# Altium PCB old_ESP32_CAN_V2.PcbDoc
Units mm, origin at the board's own origin, x right, y up, seen from the top; angles counter-clockwise.
Board outline 100 x 100 mm, 2 copper layers (Top Layer, Bottom Layer); 87 components, 95 nets, 363 pads, 0 vias.
Unrouted connection lines stored in the file: 247.
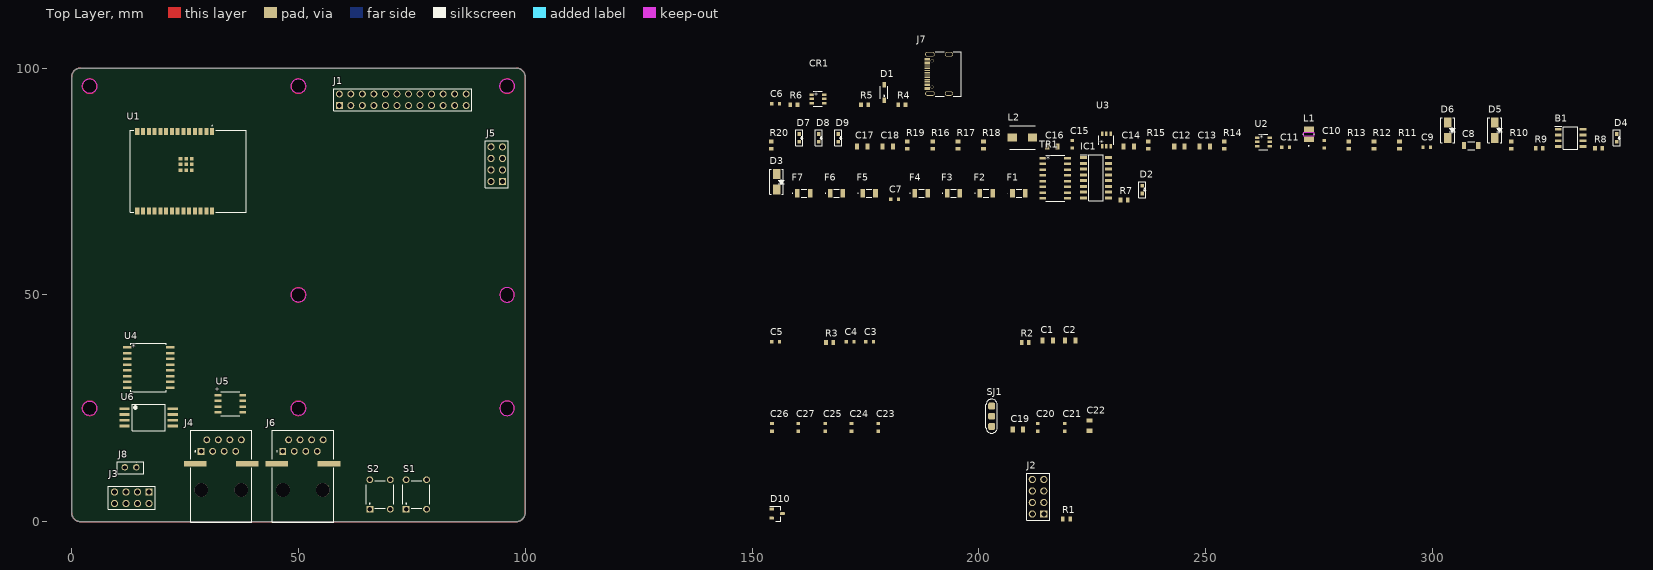
[diagram p0: Top Layer view]
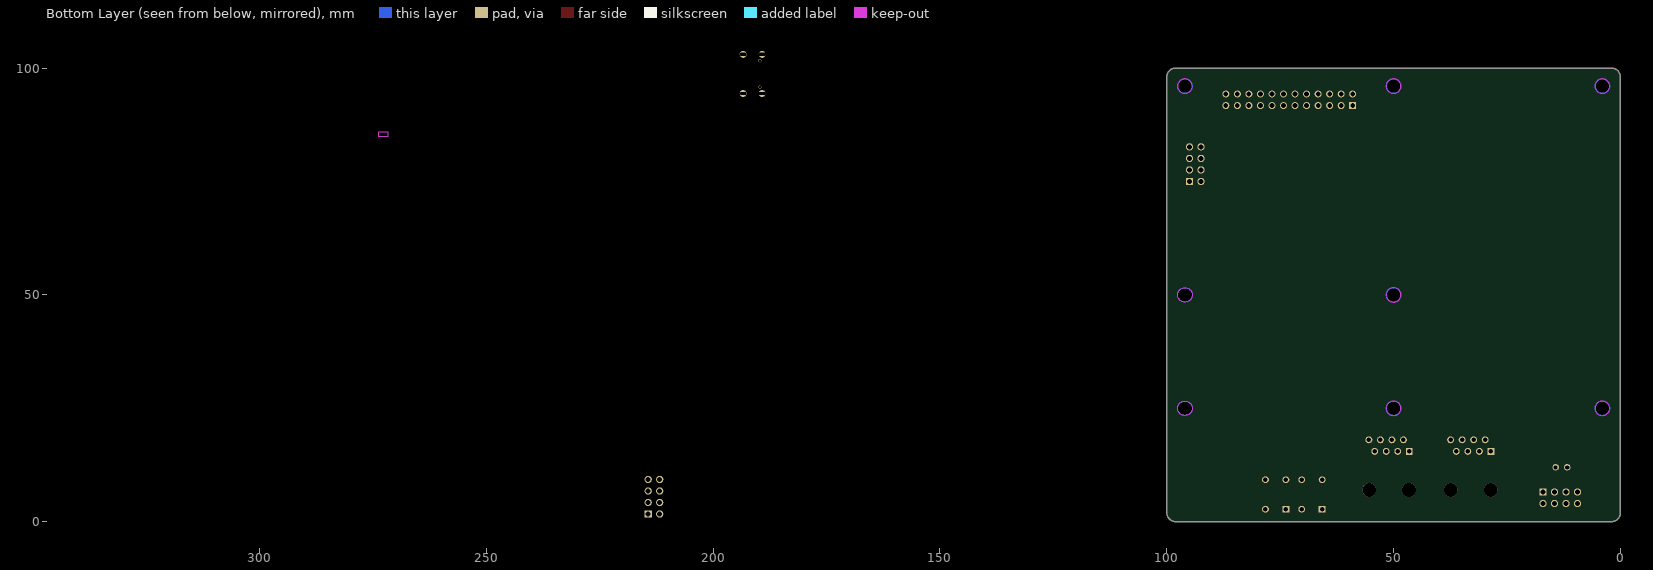
[diagram p1: Bottom Layer view, seen from below]

## Layer stack, top to bottom
Top Solder: solder mask 0.0102, Solder Resist, Dk 3.5
Top Layer: signal copper 0.0356
Dielectric 1: dielectric 0.32, FR-4, Dk 4.8
Bottom Layer: signal copper 0.0356
Bottom Solder: solder mask 0.0102, Solder Resist, Dk 3.5

## Board outline
2,0 cw(c2,2) 0,2 0,98 cw(c2,98) 2,100 98,100 cw(c98,98) 100,98 100,2 cw(c98,2) 98,0
cut-out: 94.4,50 ccw(c96,50) 96,48.4 ccw(c96,50) 97.6,50 ccw(c96,50) 96,51.6 ccw(c96,50)
cut-out: 50,48.4 cw(c50,50) 48.4,50 cw(c50,50) 50,51.6 cw(c50,50) 51.6,50 cw(c50,50)
cut-out: 48.4,96 cw(c50,96) 50,97.6 cw(c50,96) 51.6,96 cw(c50,96) 50,94.4 cw(c50,96)
cut-out: 48.4,25 cw(c50,25) 50,26.6 cw(c50,25) 51.6,25 cw(c50,25) 50,23.4 cw(c50,25)
cut-out: 96,23.4 ccw(c96,25) 97.6,25 ccw(c96,25) 96,26.6 ccw(c96,25) 94.4,25 ccw(c96,25)
cut-out: 2.4,96 cw(c4,96) 4,97.6 cw(c4,96) 5.6,96 cw(c4,96) 4,94.4 cw(c4,96)
cut-out: 4,23.4 cw(c4,25) 2.4,25 cw(c4,25) 4,26.6 cw(c4,25) 5.6,25 cw(c4,25)
cut-out: 96,94.4 cw(c96,96) 94.4,96 cw(c96,96) 96,97.6 cw(c96,96) 97.6,96 cw(c96,96)

## Design rules (kind name [scope] priority, off if disabled: settings)
Clearance [All] p1: gap=0.254 ignorepadtopadclearanceinfootprint=FALSE
PolygonConnect [All] p1: connectstyle=Relief reliefconductorwidth=0.254 reliefentries=4 polygonreliefangle="90 Angle" airgapwidth=0.254
RoutingVias [All] p1: holewidth=0.711 width=1.27 viastyle="Through Hole" minholewidth=0.711 minwidth=1.27 maxholewidth=0.711 maxwidth=1.27
SolderMaskExpansion [All] p1: expansion=0.102 istentingtop=FALSE
SupplyNets "Schematic Supply Nets_7" [InNet('+3V3')] p1: voltage=0.000
SupplyNets "Schematic Supply Nets_6" [InNet('+5')] p2: voltage=0.000
SupplyNets "Schematic Supply Nets_5" [InNet('+5V')] p3: voltage=0.000
SupplyNets "Schematic Supply Nets_4" [InNet('+12')] p4: voltage=0.000
SupplyNets "Schematic Supply Nets_3" [InNet('+12V')] p5: voltage=0.000
SupplyNets "Schematic Supply Nets_2" [InNet('+12_fused')] p6: voltage=0.000
SupplyNets "Schematic Supply Nets_1" [InNet('+5V0')] p7: voltage=0.000
SupplyNets "Schematic Supply Nets" [InNet('GND')] p8: voltage=0.000
Width [All] p1: maxlimit=0.254 minlimit=0.254 preferedwidth=0.254
30 further rules are at their usual default settings.

## Classes and differential pairs
net class OUT[6..0]: OUT0 OUT1 OUT2 OUT3 OUT4 OUT5 OUT6
net class GPIO[15..0]: GPIO0 GPIO1 GPIO2 GPIO3 GPIO4 GPIO5 GPIO6 GPIO7 GPIO8 GPIO9 GPIO10 GPIO11 GPIO12 GPIO13 GPIO14 GPIO15
component class U_ESP32_CAN_V2-usb: C6 CR1 D1 J7 R4 R5 R6
component class U_ESP32_CAN_V2-power: B1 C8 C9 C10 C11 C12 C13 C14 C15 C16 C17 C18 D4 D5 D6 D7 D8 D9 L1 L2 R8 R9 R10 R11 R12 R13 R14 R15 R16 R17 R18 R19 R20 U2 U3
component class U_ESP32_CAN_V2-out: C7 D2 D3 F1 F2 F3 F4 F5 F6 F7 IC1 R7 TR1
component class U_ESP32_CAN_V2-mcu: C1 C2 C3 C4 C5 R2 R3 S1 S2 U1
component class U_ESP32_CAN_V2-can: C19 C20 C21 C22 C23 C24 C25 C26 C27 D10 SJ1 U4 U5 U6
component class ESP32_CAN_V2-main: J1 J2 J3 J4 J5 J6 J8 R1

## Components (designator, comment, footprint, x,y, rotation, side; value= is the part's Value field where it differs from the comment)
B1 "TPS25921ADR" SOIC127P600X175-8N 330.399,84.6 r0 top
C1 "10u" C0805 215.2,39.9 r0 top
C2 "10u" C0805 220.1,39.9 r0 top
C3 "1u" C0603 175.9,39.7 r0 top
C4 "0.1u" C0603 171.6,39.7 r0 top
C5 "0.1u" C0603 155.2,39.7 r0 top
C6 "1n" C0603 155.2,92.1 r0 top
C7 "100n" C0603 181.4,71.1 r0 top
C8 "100u" C1206 308.499,82.9 r0 top
C9 "0.1u" C0603 298.699,82.5 r0 top
C10 "2u" C0603 276.099,83.2 r90 top
C11 "100n" C0603 267.599,82.5 r0 top
C12 "22u" C0805 244.199,82.7 r0 top
C13 "22u" C0805 249.799,82.7 r0 top
C14 "10u" C0805 232.999,82.7 r0 top
C15 "0.1u" C0603 220.6,83.2 r90 top
C16 "2u2" C0805 216.2,82.7 r0 top
C17 "22u" C0805 174.3,82.7 r0 top
C18 "22u" C0805 179.9,82.7 r0 top
C19 "10u" C0805 208.6,20.3 r0 top
C20 "100n" C0603 213,20.8 r90 top
C21 "100n" C0603 218.9,20.8 r90 top
C22 "10u" C0805 224.4,21.2 r90 top
C23 "47p" C0603 177.8,20.8 r90 top
C24 "47p" C0603 171.9,20.8 r90 top
C25 "47p" C0603 166.1,20.8 r90 top
C26 "100n" C0603 154.4,20.8 r90 top
C27 "100n" C0603 160.2,20.8 r90 top
CR1 "USBLC6-2SC6" SOT23-6L_STM 164.5,93.2 r0 top
D1 "1N5819HW-7-F" SOD3715X145N 179.1,94.6 r90 top
D2 "LED" LED 235.999,73.2 r90 top
D3 "SMAJ30A" SMASERIES_LTF 155.4,74.9 r90 top
D4 "LED" LED 340.599,84.6 r90 top
D5 "SMAJ30A" SMASERIES_LTF 313.699,86.3 r90 top
D6 "SMAJ58CA" SMASERIES_LTF 303.299,86.3 r90 top
D7 "LED" LED 160.4,84.6 r90 top
D8 "LED" LED 164.7,84.6 r90 top
D9 "LED" LED 169,84.6 r90 top
D10 "NUP2105L" SOT-23 155.5,1.8 r0 top
F1 "PTC Fuse" PTSAHT120624V050 208.8,72.4 r0 top
F2 "PTC Fuse" PTSAHT120624V050 201.6,72.4 r0 top
F3 "PTC Fuse" PTSAHT120624V050 194.4,72.4 r0 top
F4 "PTC Fuse" PTSAHT120624V050 187.3,72.4 r0 top
F5 "PTC Fuse" PTSAHT120624V050 175.8,72.4 r0 top
F6 "PTC Fuse" PTSAHT120624V050 168.6,72.4 r0 top
F7 "PTC Fuse" PTSAHT120624V050 161.4,72.4 r0 top
IC1 "74HC595D" SOIC127P600X175-16N 225.799,75.8 r0 top
J1 "PinHeader_2x12" AMPHENOL_10129381-924003BLF 73,93 r0 top
J2 "Conn_2x4" CONN_10129381-X08002XLF_AMP 214.3,1.7 r90 top
J3 "Conn_2x3" CONN_10129381-X08002XLF_AMP 17.08,6.54 r180 top
J4 "RJE56" AMPHENOL_RJE561881410 33,7 r0 top
J5 "Conn_2x4" CONN_10129381-X08002XLF_AMP 95,75 r90 top
J6 "RJE56" AMPHENOL_RJE561881410 51,7 r0 top
J7 "USB4105-GF-A" USB4105_GCT 192.1,98.7 r90 top
J8 "Jumper_1x1" CON2_1X2_TU_TSW 13,12 r180 top
L1 "LCENA2520MKT2R2M0NK" IND_LCEN_2520MK_TAY 272.699,85.4 r90 top
L2 "AMPLA5030S-6R8MT" IND_AMPLA5030S-6R8MT 209.6,84.7 r0 top
R1 "120R" R0603 219.3,0.6 r0 top
R2 "10k" R0603 210.2,39.5 r0 top
R3 "3k3" R0603 167.1,39.5 r0 top
R4 "5k1" R0603 183,91.9 r0 top
R5 "5k1" R0603 174.8,91.9 r0 top
R6 "100k" R0603 159.2,91.9 r0 top
R7 "120R" R0603 231.999,70.9 r0 top
R8 "1k" R0603 336.599,82.3 r0 top
R9 "100k" R0603 323.499,82.3 r0 top
R10 "470R" R0603 317.299,83 r90 top
R11 "64k9" R0603 292.699,83 r90 top
R12 "154k" R0603 287.099,83 r90 top
R13 "30k9" R0603 281.499,83 r90 top
R14 "31k6" R0603 254.099,83 r90 top
R15 "10k" R0603 237.299,83 r90 top
R16 "1k" R0603 189.8,83 r90 top
R17 "320R" R0603 195.4,83 r90 top
R18 "120R" R0603 201,83 r90 top
R19 "100k" R0603 184.2,83 r90 top
R20 "13k7" R0603 154.2,83 r90 top
S1 "TS02-66-70-BK-260-SCR-D" SW_TS02-66-70-BK-260-SCR-D 76,6 r90 top
S2 "TS02-66-70-BK-260-SCR-D" SW_TS02-66-70-BK-260-SCR-D 68,6 r90 top
SJ1 "Solderj Jumper" "SOLDERJUMPER 1X2" 202.8,21 r90 top
TR1 "ULN2003ADR" ULN2003ADR2G_OSI 216.8,75.7 r0 top
U1 "ESP32-C6-WROOM-1-N4" ESP32C6WROOM1N4 25.74,77.25 r270 top
U2 "AP62250WU-7" TSOT26STANDARD_DIO 262.699,83.7 r0 top
U3 "LMR51430YDDCR" SOT-23-THIN-6_DDC_TEX 228.099,84.1 r90 top
U4 "R05CTE05S-R" SMD_16_10.35X7.5X2.5_RCP 17,34 r0 top
U5 "TCAN1051HGDR" D8_TEX 35,26 r0 top
U6 "ISO6721FQDWVRQ1" DWV0008A-IPC_A 17,23 r0 top

## Footprints (in the part's own frame and the unit in brackets; to place one, negate y for a bottom-side part, rotate by r counter-clockwise, add the part's x,y. Pads: shape width x height; smd on the part's side, far side on the other; paste and mask are expansions set on the pad)
AMPHENOL_10129381-924003BLF [mm]
  rect 1.53x1.53 / inner round 1.53 / far side rect 1.53x1.53 hole 1.02: 01(-13.97,-1.27)
  round 1.53 hole 1.02: 02(-13.97,1.27) 03(-11.43,-1.27) 04(-11.43,1.27) 05(-8.89,-1.27) 06(-8.89,1.27) 07(-6.35,-1.27) 08(-6.35,1.27) 09(-3.81,-1.27) 10(-3.81,1.27) 11(-1.27,-1.27) 12(-1.27,1.27) 13(1.27,-1.27) 14(1.27,1.27) 15(3.81,-1.27) 16(3.81,1.27) 17(6.35,-1.27) 18(6.35,1.27) 19(8.89,-1.27) 20(8.89,1.27) 21(11.43,-1.27) 22(11.43,1.27) 23(13.97,-1.27) 24(13.97,1.27)
  silkscreen extent -15.24,-2.41 15.24,2.41, body extent -15.24,-2.41 15.24,2.41, height 10.42
AMPHENOL_RJE561881410 [mm]
  rect 1.5x1.5 / inner round 1.5 / far side rect 1.5x1.5 hole 1: 1(-4.445,8.5)
  round 1.5 hole 1: 2(-3.175,11.04) 3(-1.905,8.5) 4(-0.635,11.04) 5(0.635,8.5) 6(1.905,11.04) 7(3.175,8.5) 8(4.445,11.04)
  rect 5x1.2 smd paste-3: G1(-5.75,5.8) G2(5.75,5.8)
  round 3 hole 3 unplated: ""(-4.4,0) ""(4.4,0)
  silkscreen extent -6.75,-7.1 6.75,13.2, body extent -6.75,-7.1 6.75,13.2, height 14.61
C0603 [mm] "Ceramic Capacitors, 0603, body 1.6x0.8mm"
  rect 0.7x0.8 smd: 1(-0.85,0) 2(0.85,0)
  body extent -0.8,-0.4 0.8,0.4, height 0.8
C0805 [mm] "Ceramic Capacitors, body 2x1.25mm"
  rect 0.9x1.3 smd: 1(-1.15,0) 2(1.15,0)
  body extent -1,-0.63 1,0.63, height 0.8
C1206 [mm] "Ceramic Capacitors, body 3.2x1.6mm"
  rect 0.9x1.6 smd: 1(-1.55,0) 2(1.55,0)
  silkscreen extent -0.8,-0.87 0.8,0.87, body extent -1.6,-0.8 1.6,0.8, height 0.95
CON2_1X2_TU_TSW [mil]
  round 55 hole 35 paste-99999 mask+0: 1(-50,0) 2(50,0)
  silkscreen extent -115,-50 115,55, body extent -100,-50 100,50, height 500
CONN_10129381-X08002XLF_AMP [mil]
  rect 63x63 hole 43 paste-99999 mask+0: 1(0,0)
  round 63 hole 43 paste-99999 mask+0: 2(0,100) 3(100,0) 4(100,100) 5(200,0) 6(200,100) 7(300,0) 8(300,100)
  silkscreen extent -55,-50 355,150, body extent -50,-50 350,150, height 338
D8_TEX [mm]
  rect 1.455x0.558 smd paste+0 mask+0: 1(-2.721,1.905) 2(-2.721,0.635) 3(-2.721,-0.635) 4(-2.721,-1.905) 5(2.721,-1.905) 6(2.721,-0.635) 7(2.721,0.635) 8(2.721,1.905)
  silkscreen extent -2.12,-2.63 2.12,2.63, body extent -3.1,-2.5 3.1,2.5, height 1.76
DWV0008A-IPC_A [mm]
  rect 2.254x0.622 smd paste+0 mask+0: 1(-5.301,1.905) 2(-5.301,0.635) 3(-5.301,-0.635) 4(-5.301,-1.905) 5(5.301,-1.905) 6(5.301,-0.635) 7(5.301,0.635) 8(5.301,1.905)
  silkscreen extent -3.67,-2.93 3.67,2.93
ESP32C6WROOM1N4 [mm]
  rect 1.5x0.9 smd: 1(-8.75,5.26) 2(-8.75,3.99) 3(-8.75,2.72) 4(-8.75,1.45) 5(-8.75,0.18) 6(-8.75,-1.09) 7(-8.75,-2.36) 8(-8.75,-3.63) 9(-8.75,-4.9) 10(-8.75,-6.17) 11(-8.75,-7.44) 12(-8.75,-8.71) 13(-8.75,-9.98) 14(-8.75,-11.25) 15(8.75,-11.25) 16(8.75,-9.98) 17(8.75,-8.71) 18(8.75,-7.44) 19(8.75,-6.17) 20(8.75,-4.9) 21(8.75,-3.63) 22(8.75,-2.36) 23(8.75,-1.09) 24(8.75,0.18) 25(8.75,1.45) 26(8.75,2.72) 27(8.75,3.99) 28(8.75,5.26)
  rect 0.8x0.8 smd: 29(-1.505,-0.46) 30(-1.505,0.79) 31(-2.755,0.79) 32(-2.755,-0.46) 33(-2.755,-1.71) 34(-1.505,-1.71) 35(-0.255,-1.71) 36(-0.255,-0.46) 37(-0.255,0.79)
  silkscreen extent -10.1,-12.75 9,12.75, body extent -9.01,-12.8 9.01,12.7, height 3.1
IND_AMPLA5030S-6R8MT [mm]
  rect 2x1.8 smd: 1(-2.25,0) 2(2.25,0)
  silkscreen extent -2.85,-2.6 2.85,2.6, body extent -2.92,-2.6 2.92,2.6, height 2.8
IND_LCEN_2520MK_TAY [mil]
  rect 48.78x87 smd paste+0 mask+0: 1(-42.39,0) 2(42.39,0)
  Top Layer keep-out region: -16,-41.5 -16,41.5 16,41.5 16,-41.5
  Keep-Out Layer region: -16,-43.5 -16,43.5 16,43.5 16,-43.5
  silkscreen extent -103,-48 6,48, body extent -53,-44 53,44, height 47
LED [mm]
  rect 0.8x0.8 smd: 1(-0.85,0) 2(0.85,0)
  silkscreen extent -1.75,-0.8 1.75,0.75, body extent -0.8,-0.4 0.8,0.4, height 0.95
PTSAHT120624V050 [mm]
  rect 1x1.8 smd: 1(-1.4,0) 2(1.4,0)
  silkscreen extent -2.5,-0.85 0.6,0.85, body extent -1.62,-0.85 1.68,0.85, height 1.06
R0603 [mm]
  rect 0.808x1.041 smd paste+0 mask+0: 1(-0.798,0) 2(0.798,0)
  body extent -0.9,-0.5 0.9,0.5, height 0.56
SMASERIES_LTF [mil]
  rect 85.59x65 smd paste+0 mask+0: 1(-67.11,0) 2(67.11,0)
  silkscreen extent -109,-66 109,60, body extent -104,-55 104,55, height 92
SMD_16_10.35X7.5X2.5_RCP [mm]
  rect 1.849x0.558 smd paste+0 mask+0: 1(-4.722,4.445) 2(-4.722,3.175) 3(-4.722,1.905) 4(-4.722,0.635) 5(-4.722,-0.635) 6(-4.722,-1.905) 7(-4.722,-3.175) 8(-4.722,-4.445) 9(4.722,-4.445) 10(4.722,-3.175) 11(4.722,-1.905) 12(4.722,-0.635) 13(4.722,0.635) 14(4.722,1.905) 15(4.722,3.175) 16(4.722,4.445)
  silkscreen extent -3.92,-5.35 3.92,5.35, body extent -5.3,-5.22 5.3,5.22, height 2.64
SOD3715X145N [mm]
  rect 1.21x0.73 smd: A(1.68,0) C(-1.68,0)
  silkscreen extent -1.43,-0.85 1.43,0.85, body extent -1.83,-0.77 1.83,0.77, height 1.51
SOIC127P600X175-8N [mm]
  rect 1.528x0.65 smd: 1(-2.711,1.905) 2(-2.711,0.635) 3(-2.711,-0.635) 4(-2.711,-1.905) 5(2.711,-1.905) 6(2.711,-0.635) 7(2.711,0.635) 8(2.711,1.905)
  silkscreen extent -3.47,-2.45 1.6,2.58, body extent -3.01,-2.45 3.01,2.45, height 1.63
SOIC127P600X175-16N [mm]
  rect 1.55x0.65 smd: 1(-2.725,4.445) 2(-2.725,3.175) 3(-2.725,1.905) 4(-2.725,0.635) 5(-2.725,-0.635) 6(-2.725,-1.905) 7(-2.725,-3.175) 8(-2.725,-4.445) 9(2.725,-4.445) 10(2.725,-3.175) 11(2.725,-1.905) 12(2.725,-0.635) 13(2.725,0.635) 14(2.725,1.905) 15(2.725,3.175) 16(2.725,4.445)
  silkscreen extent -3.5,-5.1 1.6,5.12, body extent -3,-5.1 3,5.1, height 1.56
"SOLDERJUMPER 1X2" [mil]
  rrect50% 60x60 smd: 1(88.58,0) 2(0,0) 3(177.17,0)
  silkscreen extent -59,-49 236,49
SOT23-6L_STM [mil]
  rect 38.5x22 smd paste+0 mask+0: 1(-53.75,37.4) 2(-53.75,0) 3(-53.75,-37.4) 4(53.75,-37.4) 5(53.75,0) 6(53.75,37.4)
  silkscreen extent -40,-65 40,65, body extent -59,-60 59,60, height 57
SOT-23 [mm] "SOT23, 3-Leads, IPC Medium Density, TO-236"
  rrect25% 1x0.65 smd: 1(-1.2,1.02) 2(-1.2,-1.02) 3(1.2,0)
  silkscreen extent -1.65,-1.65 0.85,1.65, body extent -1.3,-1.52 1.3,1.52, height 1.3
SOT-23-THIN-6_DDC_TEX [mm]
  rect 0.998x0.558 smd paste+0 mask+0: 1(-1.375,0.95) 2(-1.375,0) 3(-1.375,-0.95) 4(1.375,-0.95) 5(1.375,0) 6(1.375,0.95)
  silkscreen extent -1,-1.65 1,1.65, body extent -1.52,-1.52 1.52,1.52, height 1.09
SW_TS02-66-70-BK-260-SCR-D [mm]
  rect 1.508x1.508 / inner round 1.508 / far side rect 1.508x1.508 hole 1 mask+0.102: 1(-3.25,2.25)
  round 1.508 hole 1 mask+0.102: 2(3.25,2.25) 3(-3.25,-2.25) 4(3.25,-2.25)
  silkscreen extent -3,-3 3,3, body extent -3.6,-3 3.6,3, height 7
TSOT26STANDARD_DIO [mm]
  rect 0.998x0.558 smd paste+0 mask+0: 1(-1.35,0.95) 2(-1.35,0) 3(-1.35,-0.95) 4(1.35,-0.95) 5(1.35,0) 6(1.35,0.95)
  silkscreen extent -0.98,-1.68 0.98,1.68, body extent -1.5,-1.55 1.5,1.55, height 0.99
ULN2003ADR2G_OSI [mm]
  rect 1.455x0.533 smd paste+0 mask+0: 1(-2.721,4.445) 2(-2.721,3.175) 3(-2.721,1.905) 4(-2.721,0.635) 5(-2.721,-0.635) 6(-2.721,-1.905) 7(-2.721,-3.175) 8(-2.721,-4.445) 9(2.721,-4.445) 10(2.721,-3.175) 11(2.721,-1.905) 12(2.721,-0.635) 13(2.721,0.635) 14(2.721,1.905) 15(2.721,3.175) 16(2.721,4.445)
  silkscreen extent -2.12,-5.12 2.12,5.12, body extent -3.1,-4.99 3.1,4.99, height 1.73
USB4105_GCT [mil]
  round 26 / inner round 60 / far side round 26 hole 26 unplated paste-99999 mask+0: 17(-113.78,94.91) 18(113.78,94.91)
  rect 23x45 smd paste-22.5 mask-22.5: A1-B12(-125.98,137.24) A4-B9(-94.49,137.24) B1-A12(125.98,137.24) B4-A9(94.49,137.24)
  rect 12x45 smd paste+0 mask+0: A5(-49.21,137.24) A6(-9.84,137.24) A7(9.84,137.24) A8(49.21,137.24) B5(68.9,137.24) B6(29.53,137.24) B7(-29.53,137.24) B8(-68.9,137.24)
  oval 39x71 / inner oval 39x71 / far side round 60 hole 55 slot 24 at 0 deg paste-99999 mask-35.5: SHELL(-170.08,-49.97) SHELL(170.08,-49.97)
  oval 39x83 / inner oval 39x83 / far side round 60 hole 67 slot 24 at 0 deg paste-99999 mask-41.5: SHELL(-170.08,114.6) SHELL(170.08,114.6)
  silkscreen extent -194,-157 194,70, body extent -177,-152 175,152, height 130

## Part data
B1: "18V, 1.6A, 90m eFuse with Adjustable +/-2% Accurate Current Limit", Manufacturer_Name="Texas Instruments", Mouser Part Number=595-TPS25921ADR, Datasheet Link=http://www.ti.com/lit/gpn/tps25921a, Geometry.Height=1.75mm, Manufacturer_Part_Number=TPS25921ADR, Mouser Price/Stock=https://www.mouser.co.uk/ProductDetail/Texas-Instruments/TPS25921ADR?qs=m%2F7bTylgptfvwfVPRm0ALQ%3D%3D
C1 C2 C3 C4 C5 C6 C7 C8 C9 C10 C11 C12 C13 C14 C15 C16 C17 C18 C19 C20 C21 C22 C23 C24 C25 C26 C27: library part C
CR1: "ESD Protection for USB 2.0 High Speed", Manufacturer_Name=STMicroelectronics, Copyright="Copyright (C) 2025 Ultra Librarian. All rights reserved.", Manufacturer_Part_Number=USBLC6-2SC6, RefDes=RefDes, Type=Type
D1: "Diode Schottky 40 V 1A Surface Mount SOD-123", Package="SOD-123 Fairchild Semiconductor", Availability="In Stock", Check_prices=https://www.snapeda.com/parts/1N5819HW-7-F/Diodes+Inc./view-part/?ref=eda, MF="Diodes Inc.", MP=1N5819HW-7-F, Price=None, Purchase-URL=https://pricing.snapeda.com/search/part/1N5819HW-7-F/?ref=eda, SnapEDA_Link=https://www.snapeda.com/parts/1N5819HW-7-F/Diodes+Inc./view-part/?ref=snap
D3 D5 D6: "No Description Available", Manufacturer_Name="Littelfuse Inc", Copyright="Copyright (C) 2026 Ultra Librarian. All rights reserved."
  D3 D5: Manufacturer_Part_Number=SMAJ30A
  D6: Manufacturer_Part_Number=SMAJ58CA
D10: library part TVS-Bidirectional-Diode_Dual, ki_description="TVS Dual Diode", ki_keywords="TVS Dual Diode"
F1 F2 F3 F4 F5 F6 F7: "PTSAHT1206"
IC1: "Shift Register Single 8-Bit Serial to Serial/Parallel 16-Pin SOIC T/R", Manufacturer_Name=Toshiba, Mouser Part Number=757-74HC595D, Datasheet Link=https://toshiba.semicon-storage.com/info/docget.jsp?did=36768&prodName=74HC595D, Geometry.Height=1.75mm, Manufacturer_Part_Number=74HC595D, Mouser Price/Stock=https://www.mouser.co.uk/ProductDetail/Toshiba/74HC595D?qs=7EBvPakHacViJoQmXKcnew%3D%3D
J1: Package=None, Availability=Unavailable, MF="{'manufacturer': u'Amphenol ICC (FCI)'}", MP=10129381-924003BLF, Price=None
J2 J5: library part PinHeader_2x4, Manufacturer_Name="Amphenol ICC", Manufacturer_Part_Number=10129381-908002BLF, Copyright="Copyright (C) 2026 Ultra Librarian. All rights reserved.", RefDes=RefDes, Type=Type
J3: library part PinHeader_2x3_1, Manufacturer_Name="Amphenol ICC", Manufacturer_Part_Number=10129381-908002BLF, Copyright="Copyright (C) 2026 Ultra Librarian. All rights reserved.", RefDes=RefDes, Type=Type
J4 J6: library part RJE561881410, "Modular Jack - Right Angle, Input Output Connectors 8P8C, Without Shield .", Package=None, Check_prices=https://www.snapeda.com/parts/RJE561881410/Amphenol/view-part/?ref=eda, MF="Amphenol Commercial Products", MP=RJE561881410, Reference=RJE56-188-1410, SnapEDA_Link=https://www.snapeda.com/parts/RJE561881410/Amphenol/view-part/?ref=snap, Supplier=Farnell, Type=RJE56
J7: "Description", Manufacturer_Name="Global Connector Technology", Copyright="Copyright (C) 2025 Ultra Librarian. All rights reserved.", Manufacturer_Part_Number=USB4105-GF-A, RefDes=RefDes, Type=Type
J8: library part TSW-102-08-T-S, "No Description Available", Manufacturer_Name="Samtec Inc", Copyright="Copyright (C) 2026 Ultra Librarian. All rights reserved.", Manufacturer_Part_Number=TSW-102-08-T-S, RefDes=RefDes, Type=Type
L1: library part L, "No Description Available", Manufacturer_Name="TAIYO YUDEN", Copyright="Copyright (C) 2026 Ultra Librarian. All rights reserved.", Manufacturer_Part_Number=LCENA2520MKT2R2M0NK
L2: "Inductor Power Shielded/Molded Wirewound 6.8uH 20% 100KHz Carbonyl Powder 4A 0.0762Ohm DCR 2220 T/R", Package=Package, Availability=Unavailable, Check_prices=https://www.snapeda.com/parts/AMPLA5030S-6R8MT/Abracon+LLC/view-part/?ref=eda, MF="Abracon LLC", MP=AMPLA5030S-6R8MT, Price=None, SnapEDA_Link=https://www.snapeda.com/parts/AMPLA5030S-6R8MT/Abracon+LLC/view-part/?ref=snap
R1 R2 R3 R4 R5 R6 R7 R8 R9 R10 R11 R12 R13 R14 R15 R16 R17 R18 R19 R20: library part R
S1 S2: "6 x 6 mm, 7 mm Actuator Height, 260 gf, Black, Short Crimped, Through Hole, SPST, Tactile Switch", Package=None, Check_prices=https://www.snapeda.com/parts/TS02-66-70-BK-260-SCR-D/Same+Sky/view-part/?ref=eda, MF="Same Sky", MP=TS02-66-70-BK-260-SCR-D, SnapEDA_Link=https://www.snapeda.com/parts/TS02-66-70-BK-260-SCR-D/Same+Sky/view-part/?ref=snap
SJ1: library part "Solder Jumper 1x2"
TR1: library part ULN2003ADR2G, "No Description Available", Manufacturer_Name=onsemi, Copyright="Copyright (C) 2026 Ultra Librarian. All rights reserved.", Manufacturer_Part_Number=ULN2003ADR2G, RefDes=RefDes, Type=Type
U1: library part ESP32-C6-WROOM-1-N4_reorder, "802.15.4, Bluetooth, WiFi Bluetooth v5.0, Zigbee Transceiver Module 2.4GHz PCB Trace Surface Mount", Manufacturer_Name="Espressif Systems", Mouser Part Number=356-ESP32C6WROOM1N4, Datasheet Link=https://www.espressif.com/sites/default/files/documentation/esp32-c6-wroom-1_wroom-1u_datasheet_en.pdf, Geometry.Height=3.25mm, Manufacturer_Part_Number=ESP32-C6-WROOM-1-N4, Mouser Price/Stock=https://www.mouser.co.uk/ProductDetail/Espressif-Systems/ESP32-C6-WROOM-1-N4?qs=8Wlm6%252BaMh8R1JRAtXlt87w%3D%3D
U2: "No Description Available", Manufacturer_Name="Diodes Inc", Copyright="Copyright (C) 2026 Ultra Librarian. All rights reserved.", Manufacturer_Part_Number=AP62250WU-7, RefDes=RefDes, Type=Type
U3: "SIMPLE SWITCHER&reg; 4.5-V to 36-V, 3-A synchronous buck converter with 40-&micro;A IQ 6-SOT-23-THIN -40 to 150", Manufacturer_Name="Texas Instruments", Copyright="Copyright (C) 2025 Ultra Librarian. All rights reserved.", Manufacturer_Part_Number=LMR51430YDDCR, RefDes=RefDes, Type=Type
U4: "DC/DC converter", Manufacturer_Name="Recom Power", Copyright="Copyright (C) 2026 Ultra Librarian. All rights reserved.", Manufacturer_Part_Number=R05CTE05S-R, RefDes=RefDes, Type=Type
U5: "Fault Protected CAN Transceiver With Flexible Data-Rate 8-SOIC -55 to 125", Manufacturer_Name="Texas Instruments", Copyright="Copyright (C) 2026 Ultra Librarian. All rights reserved.", Datasheet=https://www.ti.com/lit/gpn/tcan1051hg, Manufacturer_Part_Number=TCAN1051HGDR, RefDes=RefDes, Type=Type
U6: "Automotive, general-purpose, dual-channel, 1/1 digital isolator 8-SOIC -40 to 125", Manufacturer_Name="Texas Instruments", Copyright="Copyright (C) 2026 Ultra Librarian. All rights reserved.", Datasheet=https://www.ti.com/lit/gpn/iso6721-q1, Manufacturer_Part_Number=ISO6721FQDWVRQ1, RefDes=RefDes, Type=TYPE

## Nets (pads, with @x,y where several pads share a name; then routed paths per layer and width w, separated by ;. In a path a pad name is that pad's centre, name@x,y a point inside that pad or via, vN(x,y) a via of type N, cw(c..) or ccw(c..) an arc to the next point about the centre after c; other vN are vias at no path point)
5V0_CAN_6: C21.2 C22.2 C27.2 SJ1.2 U4.13 U4.14 U5.3 U6.8
+3V3: C1.2 C2.2 C7.1 C12.2 C13.2 C26.2 IC1.10 IC1.16 J2.1 J2.2 R2.2 R3.2 R14.2 R18.2 U1.2 U6.1
+5: C14.2 C17.2 C18.2 L2.2 R17.2 R19.2 U2.3
+5V: CR1.5 D1.C J2.3 J2.4
+5V0: C19.2 C20.2 U4.3 U4.4
+12: B1.4 C9.2 D6.1 R8.2 R10.2 R16.2
+12_fused: B1.5 C8.2 C16.2 D5.1 R9.2 U3.3 U3.5
+12V: J2.5 J2.6
CAN_GND: C21.1 C22.1 C23.1 C25.2 C27.1 D10.3 J3.5 J3.6 J4.3 J6.3 SJ1.3 U4.9 U4.10 U4.12 U4.15 U4.16 U5.2 U6.5
CAN_RX_6: U5.4 U6.7
CAN_TX_6: U5.1 U6.6
GND: B1.1 C1.1 C2.1 C3.1 C4.1 C5.1 C6.1 C7.2 C8.1 C9.1 C10.1 C12.1 C13.1 C14.1 C16.1 C17.1 C18.1 C19.1 C20.1 C26.1 CR1.2 D2.2 D3.2 D5.2 D6.2 D7.2 D8.2 D9.2 IC1.8 IC1.13 J2.7 J2.8 J4.G1 J4.G2 J6.G1 J6.G2 J7.A1-B12 J7.B1-A12 R4.1 R5.1 R6.1 R12.1 R13.1 R15.1 R20.1 S1.4 TR1.8 U1.1 U1.28 U1.29 U1.30 U1.31 U1.32 U1.33 U1.34 U1.35 U1.36 U1.37 U2.1 U3.1 U4.1 U4.2 U4.5 U4.6 U4.7 U4.8 U6.4
GPIO0: J1.03 U1.9
GPIO1: J1.05 U1.8
GPIO2: J1.07 U1.7
GPIO3: J1.09 U1.6
GPIO4: J1.11 U1.5
GPIO5: J1.13 U1.4
GPIO6: J1.15 U1.25
GPIO7: J1.17 S2.2 U1.15
GPIO8: J1.19 U1.16
GPIO9: J1.21 U1.17
GPIO10: J1.23 U1.18
GPIO11: J1.24 U1.19
GPIO12: J1.22 U1.20
GPIO13: J1.20 U1.21
GPIO14: J1.18 U1.23
GPIO15: J1.16 U1.24
NetB1_2: B1.2 C10.2
NetB1_3: B1.3 R10.1 R11.2
NetB1_6: B1.6 D4.2 R9.1
NetB1_7: B1.7 R12.2
NetB1_8: B1.8 R11.1 R13.2
NetC3_2: C3.2 R2.1 S1.1 U1.3
NetC4_2: C4.2 S1.2
NetC5_2: C5.2 S2.1
NetC6_2: C6.2 J7.SHELL R6.2
NetC11_1: C11.1 U2.6
NetC11_2: C11.2 L1.2 U2.2
NetC15_1: C15.1 L2.1 U3.2
NetC15_2: C15.2 U3.6
NetC23_2: C23.2 C24.2 D10.1 J3.1 J3.2 J4.1 J6.1 R1.1 U5.7
NetC24_1: C24.1 C25.1 D10.2 J3.3 J3.4 J4.2 J6.2 J8.2 U5.6
NetCR1_1: CR1.1 J7.A6 J7.B6
NetCR1_3: CR1.3 J7.A7 J7.B7
NetD1_A: D1.A J7.A4-B9 J7.B4-A9
NetD2_1: D2.1 R7.2
NetD3_1: D3.1 J1.01 TR1.9
NetD4_1: D4.1 R8.1
NetD7_1: D7.1 R16.1
NetD8_1: D8.1 R17.1
NetD9_1: D9.1 R18.1
NetF1_1: F1.1 TR1.16
NetF2_1: F2.1 TR1.15
NetF3_1: F3.1 TR1.14
NetF4_1: F4.1 TR1.13
NetF5_1: F5.1 TR1.12
NetF6_1: F6.1 TR1.11
NetF7_1: F7.1 TR1.10
NetIC1_1: IC1.1 TR1.1
NetIC1_2: IC1.2 TR1.2
NetIC1_3: IC1.3 TR1.3
NetIC1_4: IC1.4 TR1.4
NetIC1_5: IC1.5 TR1.5
NetIC1_6: IC1.6 TR1.6
NetIC1_7: IC1.7 TR1.7
NetIC1_11: IC1.11 R3.1 U1.10
NetIC1_15: IC1.15 R7.1
NetJ4_5: J4.5 J5.1
NetJ4_6: J4.6 J5.2
NetJ4_7: J4.7 J5.3
NetJ4_8: J4.8 J5.4
NetJ5_5: J5.5 J6.5
NetJ5_6: J5.6 J6.6
NetJ5_7: J5.7 J6.7
NetJ5_8: J5.8 J6.8
NetJ7_A5: J7.A5 R4.2
NetJ7_B5: J7.B5 R5.2
NetJ8_1: J8.1 R1.2
NetR14_1: R14.1 R15.2 U2.4
NetR19_1: R19.1 R20.2 U3.4
NetSJ1_1: SJ1.1 U5.8
OUT0: F1.2 J1.14
OUT1: F2.2 J1.12
OUT2: F3.2 J1.10
OUT3: F4.2 J1.08
OUT4: F5.2 J1.06
OUT5: F6.2 J1.04
OUT6: F7.2 J1.02
RCK: IC1.12 U1.12
RX: U1.26 U6.2
SI: IC1.14 U1.11
TX: U1.27 U6.3
USB_N: CR1.4 U1.13
USB_P: CR1.6 U1.14
pads on no net: IC1.9 J3.7 J3.8 J4. J4.4 J6. J6.4 J7.17 J7.18 J7.A8 J7.B8 L1.1 S1.3 S2.3 S2.4 U1.22 U2.5 U4.11 U5.5
copper on no net: | length 396.6
  Top Layer w0.254: 0,2 ccw(c2,2) 2,0 98,0 ccw(c98,2) 100,2 100,95 100,98 ccw(c98,98) 98,100 95,100 2,100 ccw(c2,98) 0,98 0,2

## Other copper
Multi-Layer:
  circle w0.254: c96,50 r1.6
  circle w0.254: c50,50 r1.6
  circle w0.254: c96,96 r1.6
  circle w0.254: c50,25 r1.6
  circle w0.254: c50,96 r1.6
  circle w0.254: c4,96 r1.6
  circle w0.254: c96,25 r1.6
  circle w0.254: c4,25 r1.6

## Text inside footprints (layer, text, board x,y; h text height)
CR1: Top Overlay "*" at 163.659,93.377 h1.27; Mechanical 13 "*" at 163.687,93.378 h1.27
TR1: Top Overlay "*" at 214.872,79.366 h1.27; Mechanical 13 "*" at 214.869,79.345 h1.27
U2: Top Overlay "*" at 261.925,83.915 h1.27; Mechanical 13 "*" at 261.912,83.903 h1.27
U3: Top Overlay "*" at 227.914,83.287 h1.27 r90; Mechanical 13 "*" at 227.922,83.287 h1.27 r90
U4: Top Overlay "*" at 13.278,37.887 h1.27; Mechanical 13 "*" at 13.266,37.874 h1.27
U5: Top Overlay "*" at 31.707,28.336 h1.27; Mechanical 13 "*" at 33.07,27.156 h1.27